# Altium PCB CH32V4x7VET-R0-1v2.PcbDoc (part 2 of 3)
Units mil, origin at the board's own origin, x right, y up, seen from the top; angles counter-clockwise.
Board outline 4188.98 x 2720.08 mil, 2 copper layers (Top Layer, Bottom Layer); 79 components, 117 nets, 431 pads, 739 vias.
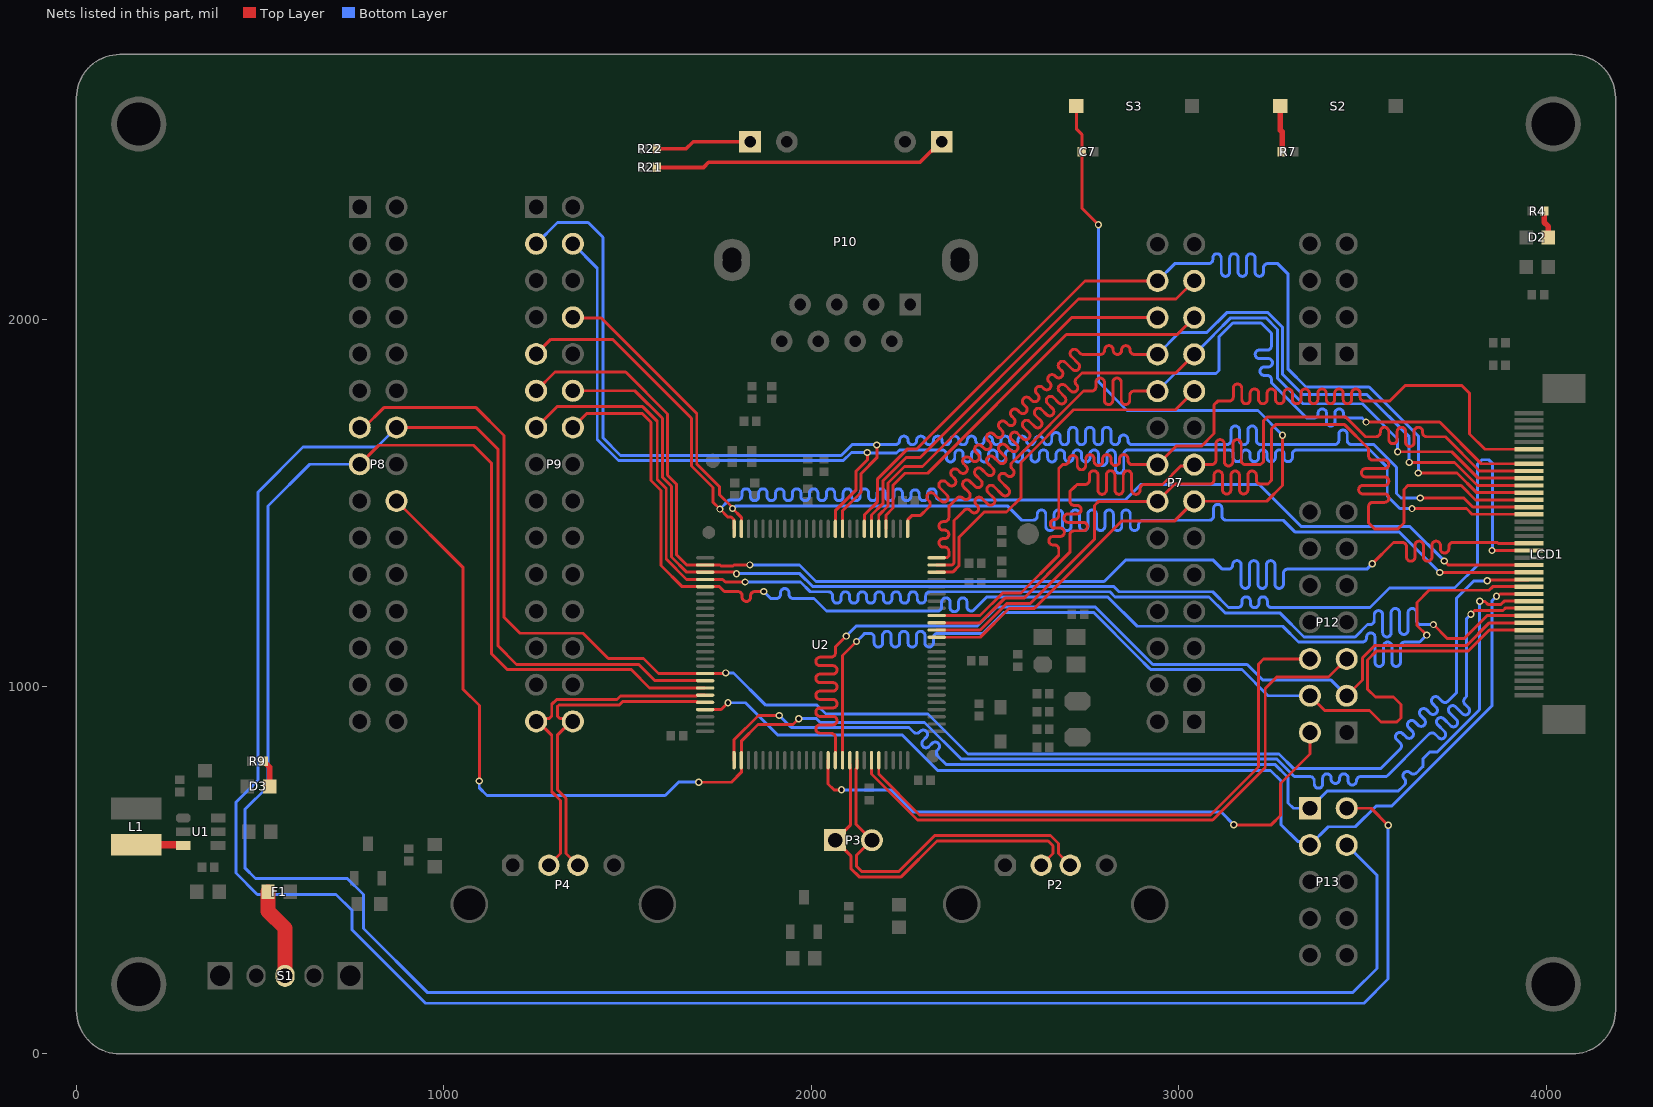
[diagram p2: the nets of this part, all layers, seen from the top]

## Via types
v1: diameter 19.68, hole 11.81, Top Layer to Bottom Layer, tented both sides, 734 vias
v2: diameter 27.56, hole 15.75, Top Layer to Bottom Layer, tented both sides, 5 vias

## Nets (pads, with @x,y where several pads share a name; then routed paths per layer and width w, separated by ;. In a path a pad name is that pad's centre, name@x,y a point inside that pad or via, vN(x,y) a via of type N, cw(c..) or ccw(c..) an arc to the next point about the centre after c; other vN are vias at no path point) (continued)
NetD2_1: D2.1 R4.2 | length 76.7
  Top Layer w15: R4.2@3994.6,2293.88 3994.6,2263.37 4006.24,2251.74 D2.1@4006.24,2221.95
NetD3_2: D3.2 R9.1 | length 75.1
  Top Layer w15: R9.1@510.17,796.79 510.17,795.8 525.61,780.37 D3.2@525.61,728.04
NetF1_2: F1.2 S1.1 | length 248.3
  Top Layer w40: F1.2@521.37,441.42 521.37,388.05 567.76,341.66 S1.1@567.76,212.3
NetL1_1: L1.1 U1.3 | length 136.5
  Top Layer w20: L1.1@162.6,586.42 180.19,568.83 289.3,568.83 U1.3@291.11,567.02
NetP10_9: P10.9 R21.2 | length 809.1
  Top Layer w10: R21.2@1574.97,2412.54 1706.81,2412.54 1720.59,2426.31 2295.77,2426.31 2327.33,2457.87 2330.59,2457.87 2352.85,2480.13 P10.9@2352.85,2483.4
NetP10_12: P10.12 R22.2 | length 276
  Top Layer w10: R22.2@1579.06,2463.06 1659.33,2463.06 1678.68,2482.4 P10.12@1833.46,2482.4 P10.12@1823.83,2472.76
NetR7_2: R7.2 S2.2 | length 127.1
  Top Layer w15: S2.2@3276.24,2579.72 3276.24,2514.1 3281.2,2509.14 R7.2@3281.2,2454.72
NRST: C7.2 P7.13 S3.2 U2.14 | length 2586.4
  Top Layer w8: U2.14@2341.12,1133.78 2459.79,1133.78 2538.26,1212.25 2606.96,1212.25 2845.51,1450.81 2989.28,1450.81 3042.48,1504.01 3239.81,1504.01 3282.54,1546.74 v1(3282.54,1683.91) ; S3.2@2721.24,2579.72 2721.24,2517.68 2736.2,2502.72 C7.2@2736.2,2454.72 2737.2,2453.72 2737.2,2300.47 v1(2781.43,2256.24)
  Bottom Layer w8: v1(2781.43,2256.24) 2781.43,1829.11 2859.55,1751 3215.45,1751 v1(3282.54,1683.91)
PA0: P7.19 U2.23 | length 1007.1
  Top Layer w8: U2.23@2341.12,1310.94 2384.89,1310.94 2402.29,1328.35 2402.29,1406.02 2470.67,1474.4 2531.53,1474.4 2570.69,1513.56 2570.69,1574.42 2570.69,1609.83 2713.82,1752.96 2991.43,1752.96 P7.19@3042.2,1803.72
PA1: LCD1.33 P7.20 U2.24 | length 2932.2
  Top Layer w8: U2.24@2341.12,1330.63 2383.43,1330.63 2388.29,1335.5 2388.29,1451.26 2397.1,1460.07 2416.19,1479.16 cw(c2424.32,1471.03) 2432.46,1479.16 2435.91,1475.7 ccw(c2444.04,1483.83) 2452.18,1475.7 ccw(c2444.04,1483.83) 2452.18,1491.97 2448.72,1495.42 cw(c2456.85,1503.55) 2448.72,1511.68 cw(c2456.85,1503.55) 2464.98,1511.68 2480.14,1496.53 ccw(c2488.27,1504.66) 2496.4,1496.53 ccw(c2488.27,1504.66) 2496.4,1512.8 2481.25,1527.95 cw(c2489.38,1536.08) 2481.25,1544.21 cw(c2489.38,1536.08) 2497.51,1544.21 2519.86,1521.87 ccw(c2527.99,1530) 2536.12,1521.87 ccw(c2527.99,1530) 2536.12,1538.13 2513.77,1560.47 cw(c2521.91,1568.61) 2513.77,1576.74 cw(c2521.91,1568.61) 2530.04,1576.74 2532.3,1574.48 ccw(c2540.43,1582.61) 2548.56,1574.48 ccw(c2540.43,1582.61) 2548.56,1590.74 2546.3,1593 cw(c2554.43,1601.13) 2546.3,1609.27 2562.24,1625.2 2740.76,1803.72 2759.19,1803.72 2763.19,1803.72 ccw(c2763.19,1815.22) 2774.69,1815.22 2774.69,1827.77 cw(c2786.19,1827.77) 2797.69,1827.77 2797.69,1778.46 ccw(c2809.19,1778.46) 2820.69,1778.46 2820.69,1827.77 cw(c2832.19,1827.77) 2843.69,1827.77 2843.69,1778.46 ccw(c2855.19,1778.46) 2866.69,1778.46 2866.69,1792.22 cw(c2878.19,1792.22) 2878.19,1803.72 P7.20@2942.2,1803.72 ; v1(3510.02,1719.37) 3710.22,1719.37 3823.47,1606.12 LCD1.33@3953.86,1606.12
  Bottom Layer w8: P7.20@2942.2,1803.72 2990.29,1851.81 3101.74,1851.81 3109.94,1860.01 3109.94,1951.86 3147.21,1989.13 3224.43,1989.13 3252.46,1961.11 3252.46,1953.92 3252.46,1926.92 cw(c3240.96,1926.92) 3240.96,1915.42 3219.66,1915.42 ccw(c3219.66,1903.92) 3219.66,1892.42 3243.56,1892.42 cw(c3243.56,1880.92) 3243.56,1869.42 3232.76,1869.42 ccw(c3232.76,1857.92) 3232.76,1846.42 3240.96,1846.42 cw(c3240.96,1834.92) 3252.46,1834.92 3252.46,1826.41 3277.77,1801.1 3348.39,1730.48 3363.72,1730.48 3367.73,1730.48 ccw(c3367.73,1741.98) 3379.23,1741.98 3379.23,1743.81 cw(c3390.73,1743.81) 3402.23,1743.81 3402.23,1720.23 ccw(c3413.73,1720.23) 3425.23,1720.23 3425.23,1743.81 cw(c3436.73,1743.81) 3448.23,1743.81 3448.23,1741.98 ccw(c3459.73,1741.98) 3459.73,1730.48 3499.49,1730.48 3500.56,1729.41 3510.02,1719.95 v1(3510.02,1719.37)
PA2: LCD1.31 P7.21 U2.25 | length 2931.2
  Top Layer w8: U2.25@2341.12,1350.31 2369.61,1350.31 2374.29,1355 2374.29,1363.82 2374.29,1367.82 ccw(c2362.79,1367.82) 2362.79,1379.32 2358.79,1379.32 cw(c2358.79,1390.82) 2358.79,1402.32 2362.79,1402.32 ccw(c2362.79,1413.82) 2362.79,1425.32 2358.79,1425.32 cw(c2358.79,1436.82) 2358.79,1448.32 2362.79,1448.32 ccw(c2362.79,1459.82) 2374.29,1459.82 2374.29,1481.6 2374.29,1490.46 2377.18,1493.35 2396.27,1512.44 cw(c2404.41,1504.31) 2412.54,1512.44 2412.98,1512 ccw(c2421.11,1520.14) 2429.24,1512 ccw(c2421.11,1520.14) 2429.24,1528.27 2415.2,1542.31 cw(c2423.33,1550.44) 2415.2,1558.57 cw(c2423.33,1550.44) 2431.47,1558.57 2445.5,1544.53 ccw(c2453.64,1552.66) 2461.77,1544.53 ccw(c2453.64,1552.66) 2461.77,1560.79 2447.73,1574.83 cw(c2455.86,1582.96) 2447.73,1591.1 cw(c2455.86,1582.96) 2463.99,1591.1 2478.03,1577.06 ccw(c2486.16,1585.19) 2494.29,1577.06 ccw(c2486.16,1585.19) 2494.29,1593.32 2480.26,1607.36 cw(c2488.39,1615.49) 2480.26,1623.62 cw(c2488.39,1615.49) 2496.52,1623.62 2510.56,1609.58 ccw(c2518.69,1617.72) 2526.82,1609.58 ccw(c2518.69,1617.72) 2526.82,1625.85 2512.78,1639.89 cw(c2520.91,1648.02) 2512.78,1656.15 cw(c2520.91,1648.02) 2529.05,1656.15 2543.08,1642.11 ccw(c2551.22,1650.24) 2559.35,1642.11 ccw(c2551.22,1650.24) 2559.35,1658.37 2545.31,1672.41 cw(c2553.44,1680.55) 2545.31,1688.68 cw(c2553.44,1680.55) 2561.57,1688.68 2575.61,1674.64 ccw(c2583.74,1682.77) 2591.88,1674.64 ccw(c2583.74,1682.77) 2591.88,1690.9 2577.84,1704.94 cw(c2585.97,1713.07) 2577.84,1721.2 cw(c2585.97,1713.07) 2594.1,1721.2 2608.14,1707.17 ccw(c2616.27,1715.3) 2624.4,1707.17 ccw(c2616.27,1715.3) 2624.4,1723.43 2610.36,1737.47 cw(c2618.5,1745.6) 2610.36,1753.73 cw(c2618.5,1745.6) 2626.63,1753.73 2640.67,1739.69 ccw(c2648.8,1747.82) 2656.93,1739.69 ccw(c2648.8,1747.82) 2656.93,1755.96 2642.89,1769.99 cw(c2651.02,1778.13) 2642.89,1786.26 cw(c2651.02,1778.13) 2659.15,1786.26 2673.19,1772.22 ccw(c2681.32,1780.35) 2689.46,1772.22 ccw(c2681.32,1780.35) 2689.46,1788.48 2675.42,1802.52 cw(c2683.55,1810.65) 2675.42,1818.78 cw(c2683.55,1810.65) 2691.68,1818.78 2705.72,1804.75 ccw(c2713.85,1812.88) 2721.98,1804.75 ccw(c2713.85,1812.88) 2721.98,1821.01 2721.54,1821.45 cw(c2729.67,1829.58) 2721.54,1837.71 2737.1,1853.27 2757.72,1853.27 2991.75,1853.27 P7.21@3042.2,1903.72 ; v1(3595.77,1638.75) 3743.27,1638.75 3815.27,1566.75 LCD1.31@3953.86,1566.75
  Bottom Layer w8: P7.21@3042.2,1903.72 3095.94,1957.46 3095.94,1957.66 3141.42,2003.13 3237.33,2003.13 3269.06,1971.41 3269.06,1838.58 3338.32,1769.31 3499.86,1769.31 3595.77,1673.4 v1(3595.77,1638.75)
PA3: LCD1.30 P7.22 U2.26 | length 2929.3
  Top Layer w8: U2.26@2262.38,1429.05 2262.57,1429.25 2262.57,1453.76 2274.57,1465.76 2297.65,1465.76 2317.65,1485.75 2320.48,1488.58 ccw(c2312.34,1496.71) 2320.48,1504.84 2317.6,1507.72 cw(c2325.73,1515.85) 2317.6,1523.99 cw(c2325.73,1515.85) 2333.86,1523.99 2352.81,1505.04 ccw(c2360.94,1513.17) 2369.07,1505.04 ccw(c2360.94,1513.17) 2369.07,1521.3 2350.26,1540.11 cw(c2358.39,1548.24) 2350.26,1556.37 cw(c2358.39,1548.24) 2366.53,1556.37 2373.91,1548.99 ccw(c2382.04,1557.12) 2390.18,1548.99 ccw(c2382.04,1557.12) 2390.18,1565.25 2382.79,1572.64 cw(c2390.92,1580.77) 2382.79,1588.9 cw(c2390.92,1580.77) 2399.05,1588.9 2404.99,1582.96 ccw(c2413.12,1591.1) 2421.25,1582.96 ccw(c2413.12,1591.1) 2421.25,1599.23 2415.32,1605.16 cw(c2423.45,1613.3) 2415.32,1621.43 cw(c2423.45,1613.3) 2431.58,1621.43 2437.52,1615.49 ccw(c2445.65,1623.62) 2453.78,1615.49 ccw(c2445.65,1623.62) 2453.78,1631.76 2447.84,1637.69 cw(c2455.97,1645.82) 2447.84,1653.95 cw(c2455.97,1645.82) 2464.11,1653.95 2470.04,1648.02 ccw(c2478.17,1656.15) 2486.31,1648.02 ccw(c2478.17,1656.15) 2486.31,1664.28 2480.37,1670.22 cw(c2488.5,1678.35) 2480.37,1686.48 cw(c2488.5,1678.35) 2496.63,1686.48 2502.57,1680.55 ccw(c2510.7,1688.68) 2518.83,1680.55 ccw(c2510.7,1688.68) 2518.83,1696.81 2512.9,1702.74 cw(c2521.03,1710.88) 2512.9,1719.01 cw(c2521.03,1710.88) 2529.16,1719.01 2535.1,1713.07 ccw(c2543.23,1721.2) 2551.36,1713.07 ccw(c2543.23,1721.2) 2551.36,1729.34 2545.42,1735.27 cw(c2553.56,1743.4) 2545.42,1751.54 cw(c2553.56,1743.4) 2561.69,1751.54 2567.62,1745.6 ccw(c2575.75,1753.73) 2583.89,1745.6 ccw(c2575.75,1753.73) 2583.89,1761.86 2577.95,1767.8 cw(c2586.08,1775.93) 2577.95,1784.06 cw(c2586.08,1775.93) 2594.21,1784.06 2600.15,1778.13 ccw(c2608.28,1786.26) 2616.41,1778.13 ccw(c2608.28,1786.26) 2616.41,1794.39 2613.55,1797.26 cw(c2621.68,1805.39) 2613.55,1813.52 cw(c2621.68,1805.39) 2629.81,1813.52 2632.68,1810.65 ccw(c2640.81,1818.78) 2648.94,1810.65 ccw(c2640.81,1818.78) 2648.94,1826.92 2646.85,1829 cw(c2654.98,1837.14) 2646.85,1845.27 cw(c2654.98,1837.14) 2663.12,1845.27 2665.2,1843.18 ccw(c2673.34,1851.31) 2681.47,1843.18 ccw(c2673.34,1851.31) 2681.47,1859.44 2675.39,1865.52 cw(c2683.52,1873.65) 2675.39,1881.78 cw(c2683.52,1873.65) 2691.66,1881.78 2710.6,1862.84 ccw(c2718.73,1870.97) 2726.87,1862.84 ccw(c2718.73,1870.97) 2726.87,1879.1 2707.92,1898.05 cw(c2716.05,1906.18) 2707.92,1914.31 cw(c2716.05,1906.18) 2724.18,1914.31 2731.4,1907.09 ccw(c2739.53,1915.22) 2739.53,1903.72 2774.98,1903.72 2783.11,1903.72 2787.11,1903.72 ccw(c2787.11,1915.22) 2798.61,1915.22 2798.61,1916.13 cw(c2810.11,1916.13) 2821.61,1916.13 2821.61,1915.15 ccw(c2833.11,1915.15) 2844.61,1915.15 2844.61,1916.13 cw(c2856.11,1916.13) 2867.61,1916.13 2867.61,1915.22 ccw(c2879.11,1915.22) 2879.11,1903.72 2899.76,1903.72 P7.22@2942.2,1903.72 ; v1(3627.21,1609.81) 3750.61,1609.81 3813.36,1547.06 LCD1.30@3953.86,1547.06
  Bottom Layer w8: P7.22@2942.2,1903.72 3002.2,1963.72 3077.24,1963.72 3130.65,2017.13 3243.13,2017.13 3283.06,1977.21 3283.06,1849.15 3337.48,1794.72 3511.74,1794.72 3627.21,1679.26 v1(3627.21,1609.81)
PA4: P7.23 U2.29 | length 1135.1
  Top Layer w8: U2.29@2203.33,1429.05 2203.33,1466.02 2222.7,1485.39 2222.7,1547.72 2255.21,1580.23 2316.73,1580.23 2694.07,1957.58 2996.06,1957.58 P7.23@3042.2,2003.72
PA5: P7.24 U2.30 | length 1054.8
  Top Layer w8: U2.30@2183.64,1429.05 2183.64,1466.13 2208.7,1491.18 2208.7,1553.52 2253.96,1598.78 2303.02,1598.78 2707.96,2003.72 P7.24@2942.2,2003.72
PA6: P7.25 U2.31 | length 1216.3
  Top Layer w8: U2.31@2163.76,1428.86 U2.31@2163.96,1429.05 2163.96,1466.24 2194.7,1496.98 2194.7,1559.32 2258.07,1622.69 2295.61,1622.69 2727.09,2054.17 2992.64,2054.17 P7.25@3042.2,2103.72
PA7: LCD1.29 P7.26 U2.32 | length 2935.2
  Top Layer w8: U2.32@2144.27,1429.05 2144.27,1466.36 2180.7,1502.78 2180.7,1565.12 2261.22,1645.64 2286.52,1645.64 2744.61,2103.72 P7.26@2942.2,2103.72 ; v1(3652.21,1580.88) 3757.63,1580.88 3811.13,1527.38 LCD1.29@3953.86,1527.38
  Bottom Layer w8: P7.26@2942.2,2103.72 2989.13,2150.66 3077.3,2150.66 3081.3,2150.66 ccw(c3081.3,2162.16) 3092.8,2162.16 3092.8,2166.16 cw(c3104.3,2166.16) 3115.8,2166.16 3115.8,2127.69 ccw(c3127.3,2127.69) 3138.8,2127.69 3138.8,2166.16 cw(c3150.3,2166.16) 3161.8,2166.16 3161.8,2127.69 ccw(c3173.3,2127.69) 3184.8,2127.69 3184.8,2166.16 cw(c3196.3,2166.16) 3207.8,2166.16 3207.8,2127.69 ccw(c3219.3,2127.69) 3230.8,2127.69 3230.8,2139.16 cw(c3242.3,2139.16) 3242.3,2150.66 3262.82,2150.66 3269.6,2150.66 3297.06,2123.21 3297.06,1864.33 3346.19,1815.2 3518.43,1815.2 3652.21,1681.42 v1(3652.21,1580.88)
PA8: LCD1.17 P8.13 U2.67 | length 4478.7
  Top Layer w8: P8.13@771.2,1704.72 782.85,1704.72 836.69,1758.57 1087.97,1758.57 1163.72,1682.82 1163.72,1188.21 1207.2,1144.72 1378.92,1144.72 1447.54,1076.1 1543.57,1076.1 1584.32,1035.35 U2.67@1711.2,1035.35 1711.39,1035.55 1765.94,1035.55 v1(1767.3,1036.91) ; v1(3839.63,1287.51) 3841.46,1289.33 3952.03,1289.33 LCD1.17@3953.86,1291.16
  Bottom Layer w8: v1@1767.3,1036.62 1788.61,1036.62 1876.31,948.92 2015.75,948.92 2039.83,924.84 2317.77,924.84 2426.63,815.98 3273.25,815.98 3313.17,776.06 3549.49,776.06 3600.13,826.69 3602.96,829.52 ccw(c3594.82,837.66) 3602.96,845.79 3593.53,855.21 cw(c3601.67,863.34) 3593.53,871.47 cw(c3601.67,863.34) 3609.8,871.47 3619.22,862.05 ccw(c3627.35,870.18) 3635.48,862.05 ccw(c3627.35,870.18) 3635.48,878.31 3626.06,887.74 cw(c3634.19,895.87) 3626.06,904 cw(c3634.19,895.87) 3642.32,904 3651.75,894.58 ccw(c3659.88,902.71) 3668.01,894.58 ccw(c3659.88,902.71) 3668.01,910.84 3658.59,920.26 cw(c3666.72,928.39) 3658.59,936.53 cw(c3666.72,928.39) 3674.85,936.53 3684.27,927.1 ccw(c3692.4,935.24) 3700.54,927.1 ccw(c3692.4,935.24) 3700.54,943.37 3691.11,952.79 cw(c3699.25,960.92) 3691.11,969.05 cw(c3699.25,960.92) 3707.38,969.05 3716.8,959.63 ccw(c3724.93,967.76) 3733.06,959.63 3747.85,974.42 3756.07,982.64 3756.07,1240.23 3803.35,1287.51 v1(3839.63,1287.51)
PA9: P8.14 P13.2 U2.68 | length 6842.5
  Top Layer w8: P8.14@871.2,1704.72 1087.94,1704.72 1147.01,1645.65 1147.01,1110.43 1197.71,1059.73 1530.66,1059.73 1574.72,1015.67 U2.68@1711.2,1015.67 ; P13.2@3457.2,668.44 3523.92,668.44 v1(3570,622.37)
  Bottom Layer w8: P8.14@871.2,1704.72 817.78,1651.3 616.62,1651.3 494.06,1528.74 494.06,744.86 433.96,684.76 433.96,492.24 492.38,433.82 706.78,433.82 749.77,390.83 749.77,337.66 949.75,137.68 3504.25,137.68 3570,203.43 v1(3570,622.37)
PA10: P8.15 P13.4 U2.69 | length 6519.5
  Top Layer w8: P8.15@771.2,1604.72 822.94,1656.46 1080.53,1656.46 1129.44,1607.55 1129.44,1088.74 1172.46,1045.73 1510.3,1045.73 1560.04,995.98 U2.69@1711.2,995.98
  Bottom Layer w8: P8.15@771.2,1604.72 634.87,1604.72 521.55,1491.4 521.55,728.02 458.22,664.69 458.22,506.23 487.07,477.37 737.1,477.37 781.11,433.36 781.11,341.11 954.79,167.43 3474.55,167.43 3539.31,232.2 3539.31,486.33 P13.4@3457.2,568.44
PA11: P4.2 P9.29 U2.70 | length 938.5
  Top Layer w8: P9.29@1251.2,904.72 P9.29@1256.05,904.72 ; P4.2@1285.92,513.35 1317.79,545.22 1317.79,689.22 1293.7,713.31 1293.7,867.08 P9.29@1256.05,904.72 ; U2.70@1711.2,976.3 1690.43,976.3 1688.09,973.96 1480.43,973.96 1471.17,964.7 1307.17,964.7 1293.7,951.22 1293.7,919.33 1286.8,912.43 1272.62,912.43 1264.92,904.72 P9.29@1256.05,904.72
PA12: P4.3 P9.30 U2.71 | length 913.6
  Top Layer w8: P9.30@1351.2,904.72 P9.30@1346.35,904.72 ; P4.3@1364.66,513.35 1332.79,545.22 1332.79,695.44 1308.7,719.52 1308.7,867.08 P9.30@1346.35,904.72 ; U2.71@1711.2,956.61 1690.43,956.61 1688.09,958.96 1486.64,958.96 1477.38,949.7 1313.39,949.7 1308.7,945.01 1308.7,919.33 1315.6,912.43 1338.64,912.43 P9.30@1346.35,904.72
PA13: LCD1.15 P13.3 U2.72 | length 2931.2
  Top Layer w8: U2.72@1711.2,936.93 1754.81,936.93 1773.4,955.51 v1(1773.4,955.65) ; v1(3864.95,1245.32) 3868.11,1245.32 3874.58,1251.79 LCD1.15@3953.86,1251.79
  Bottom Layer w8: v1(1773.4,955.65) 1820.85,955.65 1908.53,867.96 2247.6,867.96 2344.03,771.53 3250.05,771.53 3277.85,743.74 3277.85,624.22 3323.72,578.35 3347.29,578.35 P13.3@3357.2,568.44 3406.85,618.09 3480.71,618.09 3536.64,674.02 3579.27,674.02 3853.22,947.97 3853.22,1233.59 v1(3864.95,1245.32)
PA14: LCD1.14 P13.1 U2.76 | length 2928.9
  Top Layer w8: U2.76@1789.94,799.13 1789.94,854.92 1856.04,921.02 v1(1912.72,921.02) ; v1(3819.03,1231.67) 3819.47,1231.23 3833.48,1231.23 3841.23,1223.47 3877.27,1223.47 3885.9,1232.1 LCD1.14@3953.86,1232.1
  Bottom Layer w8: v1(1912.72,921.02) 1945.65,888.08 2266.28,888.08 2275.71,878.65 2278.54,875.82 ccw(c2286.67,883.96) 2294.8,875.82 2296.74,877.76 cw(c2304.87,869.63) 2313,877.76 cw(c2304.87,869.63) 2313,861.5 2304.08,852.58 ccw(c2312.21,844.45) 2304.08,836.31 ccw(c2312.21,844.45) 2320.34,836.31 2329.26,845.23 cw(c2337.4,837.1) 2345.53,845.23 cw(c2337.4,837.1) 2345.53,828.97 2343.59,827.03 ccw(c2351.72,818.9) 2343.59,810.77 2366.38,787.98 3261.65,787.98 3297.7,751.93 3297.7,682.97 3312.23,668.44 P13.1@3357.2,668.44 3404,715.24 3597.63,715.24 3611.62,729.23 3614.45,732.06 ccw(c3606.32,740.19) 3614.45,748.32 3613.73,749.04 cw(c3621.86,757.17) 3613.73,765.3 cw(c3621.86,757.17) 3630,765.3 3630.71,764.59 ccw(c3638.85,772.72) 3646.98,764.59 3659.61,777.22 3665.34,782.94 3665.34,803.78 3682.97,821.41 3703.8,821.41 3819.03,936.64 v1(3819.03,1231.67)
PA15: LCD1.13 P8.18 U2.77 | length 4584.2
  Top Layer w8: P8.18@871.2,1504.72 1051.6,1324.32 1051.6,993.14 1096.66,948.09 1096.66,742.94 v1(1096.37,742.65) ; v1(1693.97,739.42) 1694.12,739.26 1782.59,739.26 1809.63,766.3 U2.77@1809.63,799.13 1809.63,850.94 1855.18,896.49 1950.53,896.49 1965.72,911.68 v1(1965.72,912.22) ; v1(3795.22,1196.16) 3795.28,1196.16 3805.75,1206.63 3882.65,1206.63 3890,1213.98 3952.29,1213.98 LCD1.13@3953.86,1212.42
  Bottom Layer w8: v1(1096.37,742.65) 1096.37,723.99 1117.13,703.24 1602.44,703.24 1638.62,739.42 v1(1693.97,739.42) ; v1(1965.72,912.22) 2014.57,912.22 2024.71,902.08 2308.48,902.08 2408.58,801.98 3267.45,801.98 3314.73,754.7 3330.41,754.7 3357.41,754.7 cw(c3357.41,743.2) 3368.91,743.2 3368.91,734.45 ccw(c3380.41,734.45) 3391.91,734.45 3391.91,750.56 cw(c3403.41,750.56) 3414.91,750.56 3414.91,747.45 ccw(c3426.41,747.45) 3437.91,747.45 3437.91,750.56 cw(c3449.41,750.56) 3460.91,750.56 3460.91,743.2 ccw(c3472.41,743.2) 3483.91,743.2 cw(c3495.41,743.2) 3495.41,754.7 3565.86,754.7 3571.09,759.92 3662.33,851.17 3681.43,870.26 cw(c3689.56,862.13) 3697.69,870.26 3707.14,860.81 ccw(c3715.27,868.94) 3723.4,860.81 ccw(c3715.27,868.94) 3723.4,877.08 3704.99,895.49 cw(c3713.12,903.62) 3704.99,911.76 cw(c3713.12,903.62) 3721.25,911.76 3739.67,893.34 ccw(c3747.8,901.47) 3755.93,893.34 ccw(c3747.8,901.47) 3755.93,909.6 3737.51,928.02 cw(c3745.65,936.15) 3737.51,944.28 cw(c3745.65,936.15) 3753.78,944.28 3772.2,925.87 ccw(c3780.33,934) 3788.46,925.87 ccw(c3780.33,934) 3788.46,942.13 3779.01,951.58 cw(c3787.14,959.71) 3779.01,967.84 3783.57,972.41 3783.57,995.07 3783.57,1184.51 v1(3795.22,1196.16)
PB0: LCD1.27 P9.3 U2.35 | length 4478.4
  Top Layer w8: U2.35@2085.22,1429.05 2085.22,1478.17 2135.15,1528.1 2135.15,1578.96 2178.36,1622.17 v1(2178.36,1657) ; v1(3657.32,1512.78) 3775.75,1512.78 3800.52,1488.01 LCD1.27@3953.86,1488.01
  Bottom Layer w8: P9.3@1251.2,2204.72 1309.22,2262.74 1392.7,2262.74 1433.02,2222.42 1433.02,1676.62 1481.1,1628.55 2081.38,1628.55 2111.49,1658.65 2176.71,1658.65 v1(2178.36,1657) 2179.58,1658.22 2225.01,1658.22 2229.01,1658.22 ccw(c2229.01,1669.72) 2240.51,1669.72 2240.51,1669.79 cw(c2252.01,1669.79) 2263.51,1669.79 2263.51,1669.22 ccw(c2275.01,1669.22) 2286.51,1669.22 2286.51,1669.79 cw(c2298.01,1669.79) 2309.51,1669.79 2309.51,1669.22 ccw(c2321.01,1669.22) 2332.51,1669.22 2332.51,1669.79 cw(c2344.01,1669.79) 2355.51,1669.79 2355.51,1669.22 ccw(c2367.01,1669.22) 2378.51,1669.22 2378.51,1669.79 cw(c2390.01,1669.79) 2401.51,1669.79 2401.51,1669.22 ccw(c2413.01,1669.22) 2424.51,1669.22 2424.51,1669.79 cw(c2436.01,1669.79) 2447.51,1669.79 2447.51,1669.22 ccw(c2459.01,1669.22) 2470.51,1669.22 2470.51,1669.79 cw(c2482.01,1669.79) 2493.51,1669.79 2493.51,1669.22 ccw(c2505.01,1669.22) 2516.51,1669.22 2516.51,1669.79 cw(c2528.01,1669.79) 2539.51,1669.79 2539.51,1669.22 ccw(c2551.01,1669.22) 2562.51,1669.22 2562.51,1669.79 cw(c2574.01,1669.79) 2585.51,1669.79 2585.51,1669.22 ccw(c2597.01,1669.22) 2608.51,1669.22 2608.51,1669.79 cw(c2620.01,1669.79) 2631.51,1669.79 2631.51,1669.22 ccw(c2643.01,1669.22) 2654.51,1669.22 2654.51,1679.67 cw(c2666.01,1679.67) 2677.51,1679.67 2677.51,1669.22 ccw(c2689.01,1669.22) 2700.51,1669.22 2700.51,1693.91 cw(c2712.01,1693.91) 2723.51,1693.91 2723.51,1669.22 ccw(c2735.01,1669.22) 2746.51,1669.22 2746.51,1693.91 cw(c2758.01,1693.91) 2769.51,1693.91 2769.51,1669.22 ccw(c2781.01,1669.22) 2792.51,1669.22 2792.51,1693.91 cw(c2804.01,1693.91) 2815.51,1693.91 2815.51,1669.22 ccw(c2827.01,1669.22) 2838.51,1669.22 2838.51,1672.62 cw(c2850.01,1672.62) 2861.51,1672.62 2861.51,1669.72 ccw(c2873.01,1669.72) 2873.01,1658.22 2909.46,1658.22 3126.87,1658.22 3130.87,1658.22 ccw(c3130.87,1669.72) 3142.37,1669.72 3142.37,1697.48 cw(c3153.87,1697.48) 3165.37,1697.48 3165.37,1669.22 ccw(c3176.87,1669.22) 3188.37,1669.22 3188.37,1697.48 cw(c3199.87,1697.48) 3211.37,1697.48 3211.37,1669.72 ccw(c3222.87,1669.72) 3222.87,1658.22 3309.55,1658.22 3420.24,1658.22 3424.24,1658.22 ccw(c3424.24,1669.72) 3435.74,1669.72 3435.74,1686.41 cw(c3447.24,1686.41) 3458.74,1686.41 3458.74,1669.72 ccw(c3470.24,1669.72) 3470.24,1658.22 3530.92,1658.22 3592.77,1596.38 3592.77,1524.8 3604.79,1512.78 3636.41,1512.78 v1(3657.32,1512.78)
PB1: LCD1.26 P9.4 U2.36 | length 4259.1
  Top Layer w8: U2.36@2065.53,1429.05 2065.53,1478.29 2121.15,1533.9 2121.15,1584.76 2152.58,1616.2 v1(2152.58,1636.81) ; v1(3635.06,1484) 3783.01,1484 3798.39,1468.62 3953.56,1468.62 LCD1.26@3953.86,1468.32
  Bottom Layer w8: P9.4@1351.2,2204.72 1417.51,2138.42 1417.51,1672.34 1475.3,1614.55 2087.18,1614.55 2109.44,1636.81 v1(2152.58,1636.81) 2154.23,1635.16 2232.03,1635.16 2240.6,1643.72 2328.97,1643.72 2355.97,1643.72 cw(c2355.97,1632.22) 2367.47,1632.22 2367.47,1622.53 ccw(c2378.97,1622.53) 2390.47,1622.53 2390.47,1632.22 cw(c2401.97,1632.22) 2413.47,1632.22 2413.47,1622.53 ccw(c2424.97,1622.53) 2436.47,1622.53 2436.47,1632.22 cw(c2447.97,1632.22) 2459.47,1632.22 2459.47,1622.53 ccw(c2470.97,1622.53) 2482.47,1622.53 2482.47,1632.22 cw(c2493.97,1632.22) 2505.47,1632.22 2505.47,1622.53 ccw(c2516.97,1622.53) 2528.47,1622.53 2528.47,1632.22 cw(c2539.97,1632.22) 2551.47,1632.22 2551.47,1622.53 ccw(c2562.97,1622.53) 2574.47,1622.53 2574.47,1632.22 cw(c2585.97,1632.22) 2597.47,1632.22 2597.47,1622.53 ccw(c2608.97,1622.53) 2620.47,1622.53 2620.47,1632.22 cw(c2631.97,1632.22) 2643.47,1632.22 2643.47,1622.53 ccw(c2654.97,1622.53) 2666.47,1622.53 2666.47,1632.22 cw(c2677.97,1632.22) 2689.47,1632.22 2689.47,1622.53 ccw(c2700.97,1622.53) 2712.47,1622.53 2712.47,1632.22 cw(c2723.97,1632.22) 2735.47,1632.22 2735.47,1622.53 ccw(c2746.97,1622.53) 2758.47,1622.53 2758.47,1632.22 cw(c2769.97,1632.22) 2781.47,1632.22 2781.47,1612.83 ccw(c2792.97,1612.83) 2804.47,1612.83 2804.47,1632.22 cw(c2815.97,1632.22) 2827.47,1632.22 2827.47,1591.67 ccw(c2838.97,1591.67) 2850.47,1591.67 2850.47,1632.22 cw(c2861.97,1632.22) 2861.97,1643.72 2880.8,1643.72 3109.8,1643.72 3136.8,1643.72 cw(c3136.8,1632.22) 3148.3,1632.22 3148.3,1623.1 ccw(c3159.8,1623.1) 3171.3,1623.1 3171.3,1632.22 cw(c3182.8,1632.22) 3194.3,1632.22 3194.3,1623.1 ccw(c3205.8,1623.1) 3217.3,1623.1 3217.3,1632.72 cw(c3228.8,1632.72) 3240.3,1632.72 3240.3,1623.1 ccw(c3251.8,1623.1) 3263.3,1623.1 3263.3,1632.72 cw(c3274.8,1632.72) 3286.3,1632.72 3286.3,1623.1 ccw(c3297.8,1623.1) 3309.3,1623.1 3309.3,1632.22 cw(c3320.8,1632.22) 3320.8,1643.72 3336.74,1643.72 3520.4,1643.72 3567.54,1596.58 3567.54,1518.37 3601.9,1484 v1(3635.06,1484)
PB3: P12.2 U2.89 | length 1611.7
  Top Layer w8: U2.89@2045.85,799.13 2045.85,734.25 2061.52,718.58 v1(2082.2,718.58) ; v1(3150.08,623.42) 3251.83,623.42 3276.86,648.44 3276.86,735.62 3357.2,815.96 P12.2@3357.2,874.72
  Bottom Layer w8: v1(2082.2,718.58) 2217.69,718.58 2277.52,658.74 3114.75,658.74 v1(3150.08,623.42)
PB4: LCD1.11 P12.3 U2.90 | length 2930.3
  Top Layer w8: U2.90@2065.53,799.13 2065.53,857.01 2065.53,861.01 ccw(c2054.03,861.01) 2054.03,872.51 2023.81,872.51 cw(c2023.81,884.01) 2023.81,895.51 2058.82,895.51 ccw(c2058.82,907.01) 2058.82,918.51 2023.81,918.51 cw(c2023.81,930.01) 2023.81,941.51 2058.82,941.51 ccw(c2058.82,953.01) 2058.82,964.51 2023.81,964.51 cw(c2023.81,976.01) 2023.81,987.51 2058.82,987.51 ccw(c2058.82,999.01) 2058.82,1010.51 2023.81,1010.51 cw(c2023.81,1022.01) 2023.81,1033.51 2058.82,1033.51 ccw(c2058.82,1045.01) 2058.82,1056.51 2023.81,1056.51 cw(c2023.81,1068.01) 2023.81,1079.51 2054.03,1079.51 ccw(c2054.03,1091.01) 2065.53,1091.01 2065.53,1107.27 2068.96,1110.7 v1(2095.26,1137) ; P12.3@3457.2,974.72 3500.1,1017.62 3500.1,1077.77 3533.17,1110.85 3783.08,1110.85 3845.28,1173.05 LCD1.11@3953.86,1173.05
  Bottom Layer w8: v1(2095.26,1137) 2122.45,1164.19 2452.33,1164.19 2503.88,1215.75 2773.61,1215.75 2902.2,1087.16 2929.44,1059.91 3186.27,1059.91 3229.13,1017.05 3414.87,1017.05 P12.3@3457.2,974.72
PB5: LCD1.10 P12.4 U2.91 | length 2933.9
  Top Layer w8: U2.91@2085.22,799.13 2085.22,1084.29 v1(2123.27,1122.35) ; P12.4@3357.2,974.72 3397.2,934.72 3518.91,934.72 3550.61,903.03 3593.64,903.03 3605,914.38 3605,950.5 3584.36,971.14 3535.33,971.14 3514.1,992.38 3514.1,1071.98 3538.97,1096.85 3788.88,1096.85 3845.4,1153.36 LCD1.10@3953.86,1153.36
  Bottom Layer w8: v1(2123.27,1122.35) 2138.49,1137.57 2145.45,1144.52 2159.74,1144.52 cw(c2159.74,1133.02) 2171.24,1133.02 2171.24,1118.6 ccw(c2182.74,1118.6) 2194.24,1118.6 2194.24,1138.69 cw(c2205.74,1138.69) 2217.24,1138.69 2217.24,1118.6 ccw(c2228.74,1118.6) 2240.24,1118.6 2240.24,1138.69 cw(c2251.74,1138.69) 2263.24,1138.69 2263.24,1118.6 ccw(c2274.74,1118.6) 2286.24,1118.6 2286.24,1138.69 cw(c2297.74,1138.69) 2309.24,1138.69 2309.24,1118.6 ccw(c2320.74,1118.6) 2332.24,1118.6 2332.24,1133.02 cw(c2343.74,1133.02) 2343.74,1144.52 2385.83,1144.52 2467.97,1144.52 2525.19,1201.75 2767.81,1201.75 2888.2,1081.36 2919.83,1049.72 2923.65,1045.91 3172.13,1045.91 3243.32,974.72 P12.4@3357.2,974.72
PB6: P2.2 P3.1 U2.92 | length 992
  Top Layer w8: U2.92@2105.09,788.94 2104.9,788.75 2104.9,778.36 2107.24,776.02 2107.24,623.72 P3.1@2065.02,581.5 2107.52,539 2107.52,504.79 2130.57,481.74 2244.74,481.74 2342.28,579.28 2644.79,579.28 2657.79,566.28 2657.79,545.22 P2.2@2625.92,513.35
PB7: P2.3 P3.2 U2.93 | length 1002.7
  Top Layer w8: U2.93@2124.59,799.13 2124.59,778.36 2122.24,776.02 2122.24,624.27 P3.2@2165.02,581.5 2164.5,581.5 2122.52,539.52 2122.52,511.01 2136.78,496.74 2238.53,496.74 2336.06,594.28 2651,594.28 2672.79,572.49 2672.79,545.22 P2.3@2704.66,513.35
PB8: P12.5 U2.95 | length 1711.3
  Top Layer w8: U2.95@2163.76,820.1 2163.96,819.9 2163.96,761.43 2289.1,636.28 3092.46,636.28 3235.46,779.29 3235.46,994.19 3266.58,1025.3 3407.78,1025.3 P12.5@3457.2,1074.72
PB9: P12.6 U2.96 | length 1597.1
  Top Layer w8: U2.96@2183.64,799.13 2183.64,761.54 2294.9,650.28 3086.66,650.28 3216.83,780.46 3216.83,1060.55 3231.01,1074.72 P12.6@3357.2,1074.72
PB10: LCD1.18 P9.8 U2.49 | length 3672.5
  Top Layer w8: P9.8@1351.2,2004.72 1353.35,2002.58 1428.2,2002.58 1688.23,1742.54 1688.23,1605.28 1749.63,1543.88 1749.63,1522.63 1785.56,1486.71 v1(1785.56,1484.35) ; v1@1785.59,1484.38 1809.63,1460.34 U2.49@1809.63,1429.05 ; v1(3710.56,1310.09) 3710.93,1310.47 3953.48,1310.47 LCD1.18@3953.86,1310.84
  Bottom Layer w8: v1(1785.56,1484.35) 1788.72,1484.35 1795.85,1491.49 2533.57,1491.49 2572.81,1452.24 2599.56,1452.24 2603.57,1452.24 ccw(c2603.57,1463.74) 2615.07,1463.74 2615.07,1469.01 cw(c2626.57,1469.01) 2638.07,1469.01 2638.07,1435.55 ccw(c2649.57,1435.55) 2661.07,1435.55 2661.07,1469.01 cw(c2672.57,1469.01) 2684.07,1469.01 2684.07,1435.55 ccw(c2695.57,1435.55) 2707.07,1435.55 2707.07,1469.01 cw(c2718.57,1469.01) 2730.07,1469.01 2730.07,1435.55 ccw(c2741.57,1435.55) 2753.07,1435.55 2753.07,1469.01 cw(c2764.57,1469.01) 2776.07,1469.01 2776.07,1435.55 ccw(c2787.57,1435.55) 2799.07,1435.55 2799.07,1469.01 cw(c2810.57,1469.01) 2822.07,1469.01 2822.07,1435.55 ccw(c2833.57,1435.55) 2845.07,1435.55 2845.07,1469.01 cw(c2856.57,1469.01) 2868.07,1469.01 2868.07,1435.55 ccw(c2879.57,1435.55) 2891.07,1435.55 2891.07,1440.74 cw(c2902.57,1440.74) 2902.57,1452.24 2923.85,1452.24 3079.34,1452.24 3083.34,1452.24 ccw(c3083.34,1463.74) 3094.84,1463.74 3094.84,1484.17 cw(c3106.34,1484.17) 3117.84,1484.17 3117.84,1463.74 ccw(c3129.34,1463.74) 3129.34,1452.24 3187.8,1452.24 3284.61,1452.24 3316.13,1420.72 3599.93,1420.72 v1(3710.56,1310.09)
PB11: LCD1.19 P9.9 U2.50 | length 3738
  Top Layer w8: P9.9@1251.2,1904.72 1291.2,1944.72 1458.66,1944.72 1673.78,1729.6 1673.78,1599.93 1732.54,1541.18 1732.54,1501.36 v1(1751.26,1482.64) 1772.7,1461.19 1782.06,1461.19 1789.44,1453.81 1789.44,1450.33 1789.94,1449.83 U2.50@1789.94,1429.05 ; v1(3722.63,1341.33) 3722.87,1341.33 3733.67,1330.53 LCD1.19@3953.86,1330.53
  Bottom Layer w8: v1(1751.26,1482.64) 1775.51,1506.88 1795.35,1506.88 1799.35,1506.88 ccw(c1799.35,1518.38) 1810.85,1518.38 1810.85,1526.47 cw(c1822.35,1526.47) 1833.85,1526.47 1833.85,1516.99 ccw(c1845.35,1516.99) 1856.85,1516.99 1856.85,1526.47 cw(c1868.35,1526.47) 1879.85,1526.47 1879.85,1516.99 ccw(c1891.35,1516.99) 1902.85,1516.99 1902.85,1526.47 cw(c1914.35,1526.47) 1925.85,1526.47 1925.85,1516.99 ccw(c1937.35,1516.99) 1948.85,1516.99 1948.85,1526.47 cw(c1960.35,1526.47) 1971.85,1526.47 1971.85,1516.99 ccw(c1983.35,1516.99) 1994.85,1516.99 1994.85,1526.47 cw(c2006.35,1526.47) 2017.85,1526.47 2017.85,1516.99 ccw(c2029.35,1516.99) 2040.85,1516.99 2040.85,1526.47 cw(c2052.35,1526.47) 2063.85,1526.47 2063.85,1516.99 ccw(c2075.35,1516.99) 2086.85,1516.99 2086.85,1526.47 cw(c2098.35,1526.47) 2109.85,1526.47 2109.85,1516.99 ccw(c2121.35,1516.99) 2132.85,1516.99 2132.85,1526.47 cw(c2144.35,1526.47) 2155.85,1526.47 2155.85,1516.99 ccw(c2167.35,1516.99) 2178.85,1516.99 2178.85,1526.47 cw(c2190.35,1526.47) 2201.85,1526.47 2201.85,1516.99 ccw(c2213.35,1516.99) 2224.85,1516.99 2224.85,1526.47 cw(c2236.35,1526.47) 2247.85,1526.47 2247.85,1516.99 ccw(c2259.35,1516.99) 2270.85,1516.99 2270.85,1523.59 cw(c2282.35,1523.59) 2293.85,1523.59 2293.85,1516.99 ccw(c2305.35,1516.99) 2316.85,1516.99 2316.85,1526.47 cw(c2328.35,1526.47) 2339.85,1526.47 2339.85,1518.38 ccw(c2351.35,1518.38) 2351.35,1506.88 2422.15,1506.88 2853.61,1506.88 2896.4,1549.68 3219.33,1549.68 3334.29,1434.72 3629.86,1434.72 3722.63,1341.95 v1(3722.63,1341.33)
PB12: LCD1.22 P9.11 U2.52 | length 3839.8
  Top Layer w8: P9.11@1251.2,1804.72 1302.15,1855.67 1494.93,1855.67 1608.79,1741.81 1608.79,1574.97 1633.22,1550.54 1633.22,1358.36 1660.95,1330.63 U2.52@1711.2,1330.63 1751.89,1330.63 1754.92,1327.6 1786.19,1327.6 1789.39,1330.8 v1(1832.88,1330.8) ; v1(3526.96,1334.19) 3581.58,1388.81 3584.54,1391.77 3608.58,1391.77 cw(c3608.58,1380.27) 3620.08,1380.27 3620.08,1352.18 ccw(c3631.58,1352.18) 3643.08,1352.18 3643.08,1383.96 cw(c3654.58,1383.96) 3666.08,1383.96 3666.08,1352.18 ccw(c3677.58,1352.18) 3689.08,1352.18 3689.08,1383.96 cw(c3700.58,1383.96) 3712.08,1383.96 3712.08,1374.67 ccw(c3723.58,1374.67) 3735.08,1374.67 3735.08,1380.27 cw(c3746.58,1380.27) 3746.58,1391.77 3771.8,1391.77 3867.67,1391.77 3869.86,1389.58 LCD1.22@3953.86,1389.58
  Bottom Layer w8: v1(1832.88,1330.8) 1967.61,1330.8 2012.66,1285.75 2797.16,1285.75 2855.14,1343.72 3094.11,1343.72 3118.67,1319.16 3131.4,1319.16 3135.4,1319.16 ccw(c3135.4,1330.66) 3146.9,1330.66 3146.9,1330.89 cw(c3158.4,1330.89) 3169.9,1330.89 3169.9,1278.25 ccw(c3181.4,1278.25) 3192.9,1278.25 3192.9,1330.89 cw(c3204.4,1330.89) 3215.9,1330.89 3215.9,1278.25 ccw(c3227.4,1278.25) 3238.9,1278.25 3238.9,1330.89 cw(c3250.4,1330.89) 3261.9,1330.89 3261.9,1278.25 ccw(c3273.4,1278.25) 3284.9,1278.25 3284.9,1307.66 cw(c3296.4,1307.66) 3296.4,1319.16 3361.09,1319.16 3511.93,1319.16 v1(3526.96,1334.19)
PB13: LCD1.21 P9.12 U2.53 | length 3704.7
  Top Layer w8: P9.12@1351.2,1804.72 1519.83,1804.72 1594.79,1729.77 1594.79,1569.17 1619.22,1544.74 1619.22,1352.56 1660.83,1310.94 U2.53@1711.2,1310.94 1789.3,1310.94 1793.28,1306.97 v1(1796.44,1306.97) ; v1(3852.86,1369.93) LCD1.21@3953.84,1369.91
  Bottom Layer w8: v1(1796.44,1306.97) 1968.77,1306.97 2003.98,1271.75 2823.43,1271.75 2837.46,1257.72 3092.72,1257.72 3135.72,1214.72 3156.64,1214.72 3160.64,1214.72 ccw(c3160.64,1226.22) 3172.14,1226.22 3172.14,1232.46 cw(c3183.64,1232.46) 3195.14,1232.46 3195.14,1225.8 ccw(c3206.64,1225.8) 3218.14,1225.8 3218.14,1232.46 cw(c3229.64,1232.46) 3241.14,1232.46 3241.14,1226.22 ccw(c3252.64,1226.22) 3252.64,1214.72 3281.64,1214.72 3520.69,1214.72 3573.5,1267.53 3750.48,1267.53 3813.8,1330.84 3813.8,1605.32 3825.43,1616.95 3843.92,1616.95 3854.6,1606.28 3854.6,1369.25 v1@3856.03,1367.82
PB14: LCD1.12 P9.13 U2.54 | length 3815
  Top Layer w8: P9.13@1251.2,1704.72 1307.87,1761.4 1541.06,1761.4 1580.79,1721.67 1580.79,1563.37 1605.22,1538.94 1605.22,1346.49 1660.45,1291.26 U2.54@1711.2,1291.26 1758.83,1291.26 1766.06,1284.03 v1(1819.83,1284.03) ; v1(3693.21,1168.24) 3730.75,1130.7 3777.35,1130.7 3839.28,1192.63 3888.45,1192.63 3888.55,1192.73 LCD1.12@3953.86,1192.73
  Bottom Layer w8: v1(1819.83,1284.03) 1970.74,1284.03 1997.02,1257.75 2019.83,1257.75 2046.83,1257.75 cw(c2046.83,1246.25) 2058.33,1246.25 2058.33,1238.1 ccw(c2069.83,1238.1) 2081.33,1238.1 2081.33,1246.25 cw(c2092.83,1246.25) 2104.33,1246.25 2104.33,1238.1 ccw(c2115.83,1238.1) 2127.33,1238.1 2127.33,1246.25 cw(c2138.83,1246.25) 2150.33,1246.25 2150.33,1238.1 ccw(c2161.83,1238.1) 2173.33,1238.1 2173.33,1246.25 cw(c2184.83,1246.25) 2196.33,1246.25 2196.33,1238.1 ccw(c2207.83,1238.1) 2219.33,1238.1 2219.33,1246.25 cw(c2230.83,1246.25) 2242.33,1246.25 2242.33,1238.1 ccw(c2253.83,1238.1) 2265.33,1238.1 2265.33,1246.25 cw(c2276.83,1246.25) 2288.33,1246.25 2288.33,1238.1 ccw(c2299.83,1238.1) 2311.33,1238.1 2311.33,1246.25 cw(c2322.83,1246.25) 2322.83,1257.75 2374.27,1257.75 2812.9,1257.75 2826.92,1243.72 3082.41,1243.72 3125.84,1200.3 3275.05,1200.3 3340.63,1134.72 3480.4,1134.72 3513.91,1168.24 3516.68,1168.24 3520.68,1168.24 ccw(c3520.68,1179.74) 3532.18,1179.74 3532.18,1194.91 cw(c3543.68,1194.91) 3555.18,1194.91 3555.18,1146.22 ccw(c3566.68,1146.22) 3578.18,1146.22 3578.18,1200.64 cw(c3589.68,1200.64) 3601.18,1200.64 3601.18,1152.92 ccw(c3612.68,1152.92) 3624.18,1152.92 3624.18,1200.64 cw(c3635.68,1200.64) 3647.18,1200.64 3647.18,1179.74 ccw(c3658.68,1179.74) 3658.68,1168.24 3690.82,1168.24 v1(3693.21,1168.24)
PB15: LCD1.16 P9.14 U2.55 | length 3715.8
  Top Layer w8: P9.14@1351.2,1704.72 1389.76,1743.28 1539.38,1743.28 1563.95,1718.71 1563.95,1560.42 1591.22,1533.14 1591.22,1328.99 1648.64,1271.57 U2.55@1711.2,1271.57 1750.05,1271.57 1763.37,1258.25 1773.3,1258.25 1800.3,1258.25 cw(c1800.3,1246.75) 1811.8,1246.75 1811.8,1242.75 ccw(c1823.3,1242.75) 1834.8,1242.75 1834.8,1246.75 cw(c1846.3,1246.75) 1846.3,1258.25 1869.86,1258.25 v1(1870.61,1258.25) ; v1(3674.78,1139.7) 3648.27,1166.21 3648.27,1228.55 3681.5,1261.78 3844.8,1261.78 3854.49,1271.47 LCD1.16@3953.86,1271.47
  Bottom Layer w8: v1(1870.61,1258.25) 1889.54,1239.32 1900.81,1239.32 1904.81,1239.32 ccw(c1904.81,1250.82) 1916.31,1250.82 1916.31,1254.82 cw(c1927.81,1254.82) 1939.31,1254.82 1939.31,1250.82 ccw(c1950.81,1250.82) 1950.81,1239.32 2004.54,1239.32 2007.12,1239.32 2041.25,1205.2 2247.32,1205.2 2343.32,1205.2 ccw(c2343.32,1216.7) 2354.82,1216.7 2354.82,1229.59 cw(c2366.32,1229.59) 2377.82,1229.59 2377.82,1214.68 ccw(c2389.32,1214.68) 2400.82,1214.68 2400.82,1229.59 cw(c2412.32,1229.59) 2423.82,1229.59 2423.82,1216.7 ccw(c2435.32,1216.7) 2435.32,1205.2 2439.31,1205.2 2477.39,1243.28 2477.86,1243.75 2807.1,1243.75 2887.12,1163.72 3283.3,1163.72 3325.83,1121.2 3334.35,1121.2 3334.83,1120.72 3495.76,1120.72 3499.76,1120.72 ccw(c3499.76,1132.22) 3511.26,1132.22 3511.26,1134.29 cw(c3522.76,1134.29) 3534.26,1134.29 3534.26,1065.82 ccw(c3545.76,1065.82) 3557.26,1065.82 3557.26,1109.22 cw(c3568.76,1109.22) 3580.26,1109.22 3580.26,1065.82 ccw(c3591.76,1065.82) 3603.26,1065.82 3603.26,1109.22 cw(c3614.76,1109.22) 3614.76,1120.72 3655.81,1120.72 3660.51,1125.43 v1(3674.78,1139.7)
PC0: LCD1.28 P7.14 U2.15 | length 2960.8
  Top Layer w8: U2.15@2341.12,1153.46 2459.67,1153.46 2532.46,1226.25 2596.35,1226.25 2770.61,1400.51 2770.61,1492.21 2782.13,1503.72 P7.14@2942.2,1503.72 2989.3,1550.82 3080.66,1550.82 3084.66,1550.82 ccw(c3084.66,1562.32) 3096.16,1562.32 3096.16,1574.79 cw(c3107.66,1574.79) 3119.16,1574.79 3119.16,1535.32 ccw(c3130.66,1535.32) 3142.16,1535.32 3142.16,1574.79 cw(c3153.66,1574.79) 3165.16,1574.79 3165.16,1535.32 ccw(c3176.66,1535.32) 3188.16,1535.32 3188.16,1574.79 cw(c3199.66,1574.79) 3211.16,1574.79 3211.16,1562.32 ccw(c3222.66,1562.32) 3222.66,1550.82 3242.49,1550.82 3242.88,1551.21 3252.83,1561.15 3252.83,1701.19 3264.02,1712.38 3451.62,1712.38 3516.66,1647.35 3516.66,1631.55 3516.66,1627.55 ccw(c3528.16,1627.55) 3528.16,1616.05 3560.39,1616.05 cw(c3560.39,1604.55) 3560.39,1593.05 3508.7,1593.05 ccw(c3508.7,1581.55) 3508.7,1570.05 3560.39,1570.05 cw(c3560.39,1558.55) 3560.39,1547.05 3501.16,1547.05 ccw(c3501.16,1535.55) 3501.16,1524.05 3560.39,1524.05 cw(c3560.39,1512.55) 3560.39,1501.05 3528.16,1501.05 ccw(c3528.16,1489.55) 3516.66,1489.55 3516.66,1458.8 3516.66,1445.52 3533.25,1428.92 3597.11,1428.92 3612.89,1444.7 3612.89,1536.32 3623.19,1546.62 3768.72,1546.62 3807.65,1507.69 LCD1.28@3953.86,1507.69
PC1: LCD1.32 P7.15 U2.16 | length 2960.1
  Top Layer w8: U2.16@2341.12,1173.15 2459.56,1173.15 2526.66,1240.25 2578.84,1240.25 2703.69,1365.1 2703.69,1385.15 2703.69,1412.15 cw(c2715.19,1412.15) 2715.19,1423.65 2739.94,1423.65 ccw(c2739.94,1435.15) 2739.94,1446.65 2698.98,1446.65 cw(c2698.98,1458.15) 2698.98,1469.65 2723.11,1469.65 ccw(c2723.11,1481.15) 2723.11,1492.65 2715.19,1492.65 cw(c2715.19,1504.15) 2703.69,1504.15 2703.69,1530.29 2716.92,1543.52 2723.32,1549.92 2741.56,1549.92 2745.56,1549.92 ccw(c2745.56,1561.42) 2757.06,1561.42 2757.06,1575.55 cw(c2768.56,1575.55) 2780.06,1575.55 2780.06,1534.42 ccw(c2791.56,1534.42) 2803.06,1534.42 2803.06,1575.55 cw(c2814.56,1575.55) 2826.06,1575.55 2826.06,1534.42 ccw(c2837.56,1534.42) 2849.06,1534.42 2849.06,1575.55 cw(c2860.56,1575.55) 2872.06,1575.55 2872.06,1534.42 ccw(c2883.56,1534.42) 2895.06,1534.42 2895.06,1538.42 cw(c2906.56,1538.42) 2906.56,1549.92 2948.44,1549.92 2956.09,1549.92 3006.6,1600.42 3038.9,1600.42 P7.15@3042.2,1603.72 3085.67,1603.72 3089.67,1603.72 ccw(c3089.67,1615.22) 3101.17,1615.22 3101.17,1660.16 cw(c3112.67,1660.16) 3124.17,1660.16 3124.17,1611.63 ccw(c3135.67,1611.63) 3147.17,1611.63 3147.17,1660.16 cw(c3158.67,1660.16) 3170.17,1660.16 3170.17,1615.22 ccw(c3181.67,1615.22) 3181.67,1603.72 3222.67,1603.72 3227.93,1608.99 3231.23,1612.29 3231.23,1724.02 3240.03,1732.83 3455.11,1732.83 3508.41,1679.52 3533.16,1679.52 3537.16,1679.52 ccw(c3537.16,1691.02) 3548.66,1691.02 3548.66,1693.87 cw(c3560.16,1693.87) 3571.66,1693.87 3571.66,1672.09 ccw(c3583.16,1672.09) 3594.66,1672.09 3594.66,1693.87 cw(c3606.16,1693.87) 3617.66,1693.87 3617.66,1664.25 ccw(c3629.16,1664.25) 3640.66,1664.25 3640.66,1693.87 cw(c3652.16,1693.87) 3663.66,1693.87 3663.66,1691.02 ccw(c3675.16,1691.02) 3675.16,1679.52 3708.75,1679.52 3725.88,1679.52 3818.97,1586.43 LCD1.32@3953.86,1586.43
PC2: LCD1.35 P7.16 U2.17 | length 2963.9
  Top Layer w8: U2.17@2341.12,1192.83 2459.45,1192.83 2520.86,1254.25 2570.56,1254.25 2673.48,1357.17 2673.48,1369.55 2673.48,1373.55 ccw(c2661.98,1373.55) 2661.98,1385.05 2657.98,1385.05 cw(c2657.98,1396.55) 2657.98,1408.05 2677.31,1408.05 ccw(c2677.31,1419.55) 2677.31,1431.05 2661.98,1431.05 cw(c2661.98,1442.55) 2661.98,1454.05 ccw(c2661.98,1465.55) 2673.48,1465.55 2673.48,1490.06 2673.48,1592.8 2684.4,1603.72 2685.44,1603.72 2689.44,1603.72 ccw(c2689.44,1615.22) 2700.94,1615.22 2700.94,1617.37 cw(c2712.44,1617.37) 2723.94,1617.37 2723.94,1601.18 ccw(c2735.44,1601.18) 2746.94,1601.18 2746.94,1619.22 cw(c2758.44,1619.22) 2769.94,1619.22 2769.94,1612.55 ccw(c2781.44,1612.55) 2792.94,1612.55 2792.94,1619.22 cw(c2804.44,1619.22) 2815.94,1619.22 2815.94,1612.55 ccw(c2827.44,1612.55) 2838.94,1612.55 2838.94,1619.22 cw(c2850.44,1619.22) 2861.94,1619.22 2861.94,1615.22 ccw(c2873.44,1615.22) 2873.44,1603.72 2927.96,1603.72 P7.16@2942.2,1603.72 2950.91,1603.72 2950.91,1612.43 2992.46,1653.98 3061.67,1653.98 3096.17,1688.48 3096.17,1766.39 3106.06,1776.29 3133.11,1776.29 3137.11,1776.29 ccw(c3137.11,1787.79) 3148.61,1787.79 3148.61,1811.8 cw(c3160.11,1811.8) 3171.61,1811.8 3171.61,1780.81 ccw(c3183.11,1780.81) 3194.61,1780.81 3194.61,1798.31 cw(c3206.11,1798.31) 3217.61,1798.31 3217.61,1780.81 ccw(c3229.11,1780.81) 3240.61,1780.81 3240.61,1798.31 cw(c3252.11,1798.31) 3263.61,1798.31 3263.61,1780.81 ccw(c3275.11,1780.81) 3286.61,1780.81 3286.61,1798.31 cw(c3298.11,1798.31) 3309.61,1798.31 3309.61,1780.81 ccw(c3321.11,1780.81) 3332.61,1780.81 3332.61,1798.31 cw(c3344.11,1798.31) 3355.61,1798.31 3355.61,1780.81 ccw(c3367.11,1780.81) 3378.61,1780.81 3378.61,1798.31 cw(c3390.11,1798.31) 3401.61,1798.31 3401.61,1780.81 ccw(c3413.11,1780.81) 3424.61,1780.81 3424.61,1798.31 cw(c3436.11,1798.31) 3447.61,1798.31 3447.61,1780.81 ccw(c3459.11,1780.81) 3470.61,1780.81 3470.61,1798.31 cw(c3482.11,1798.31) 3493.61,1798.31 3493.61,1787.79 ccw(c3505.11,1787.79) 3505.11,1776.29 3548.75,1776.29 3573.51,1776.29 3616.33,1819.11 3770.43,1819.11 3791.39,1798.15 3791.39,1687.36 3833.26,1645.49 LCD1.35@3953.86,1645.49